# Altium PCB AD8349.PcbDoc
Units mm, origin at the board's own origin, x right, y up, seen from the top; angles counter-clockwise.
Board outline 94.9 x 39.9 mm, 2 copper layers (Top Layer, Bottom Layer); 32 components, 21 nets, 97 pads, 155 vias.
Unrouted connection lines stored in the file: 1.
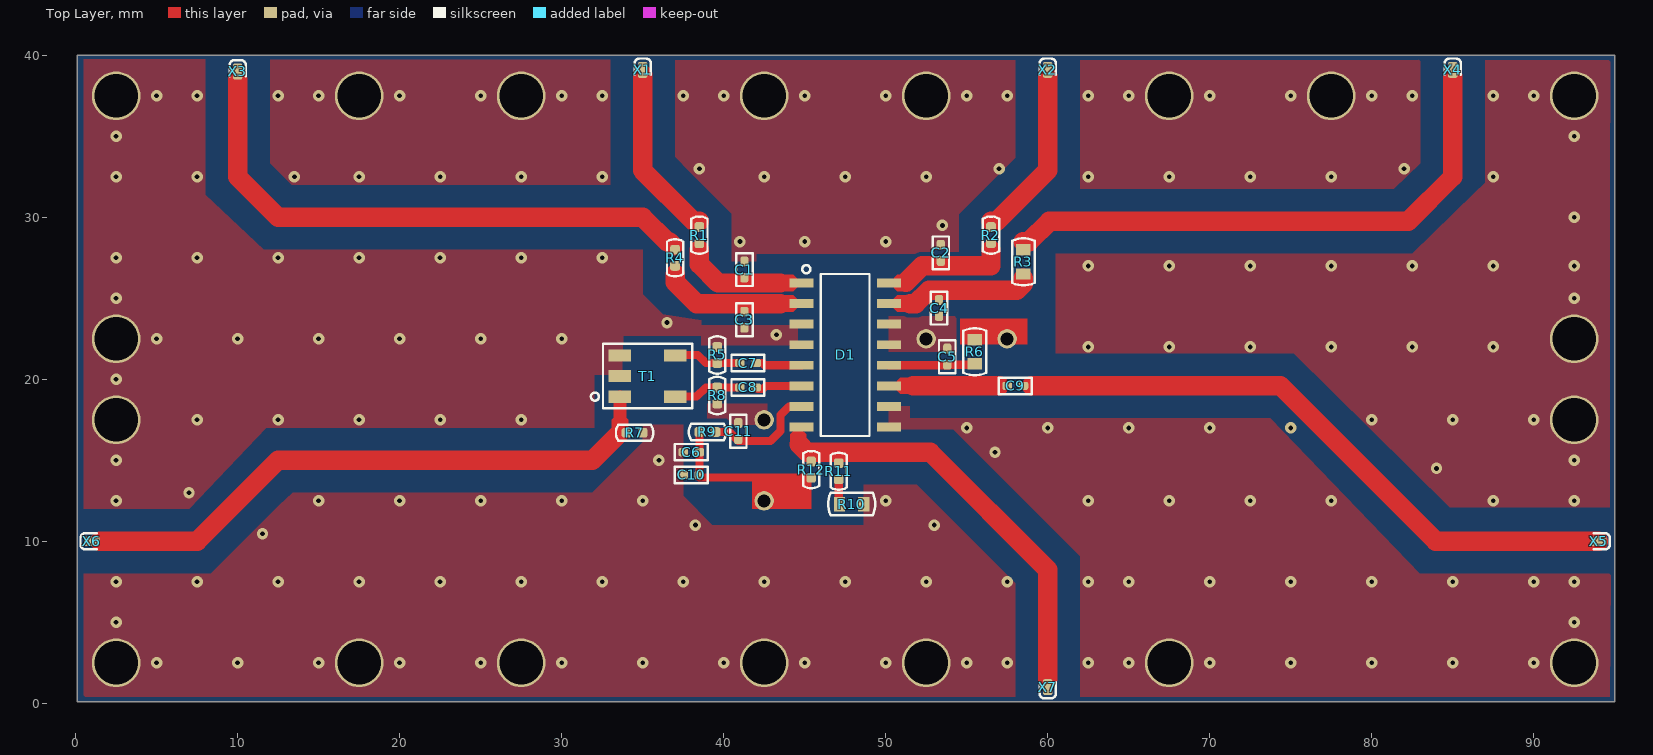
[diagram p0: Top Layer view]
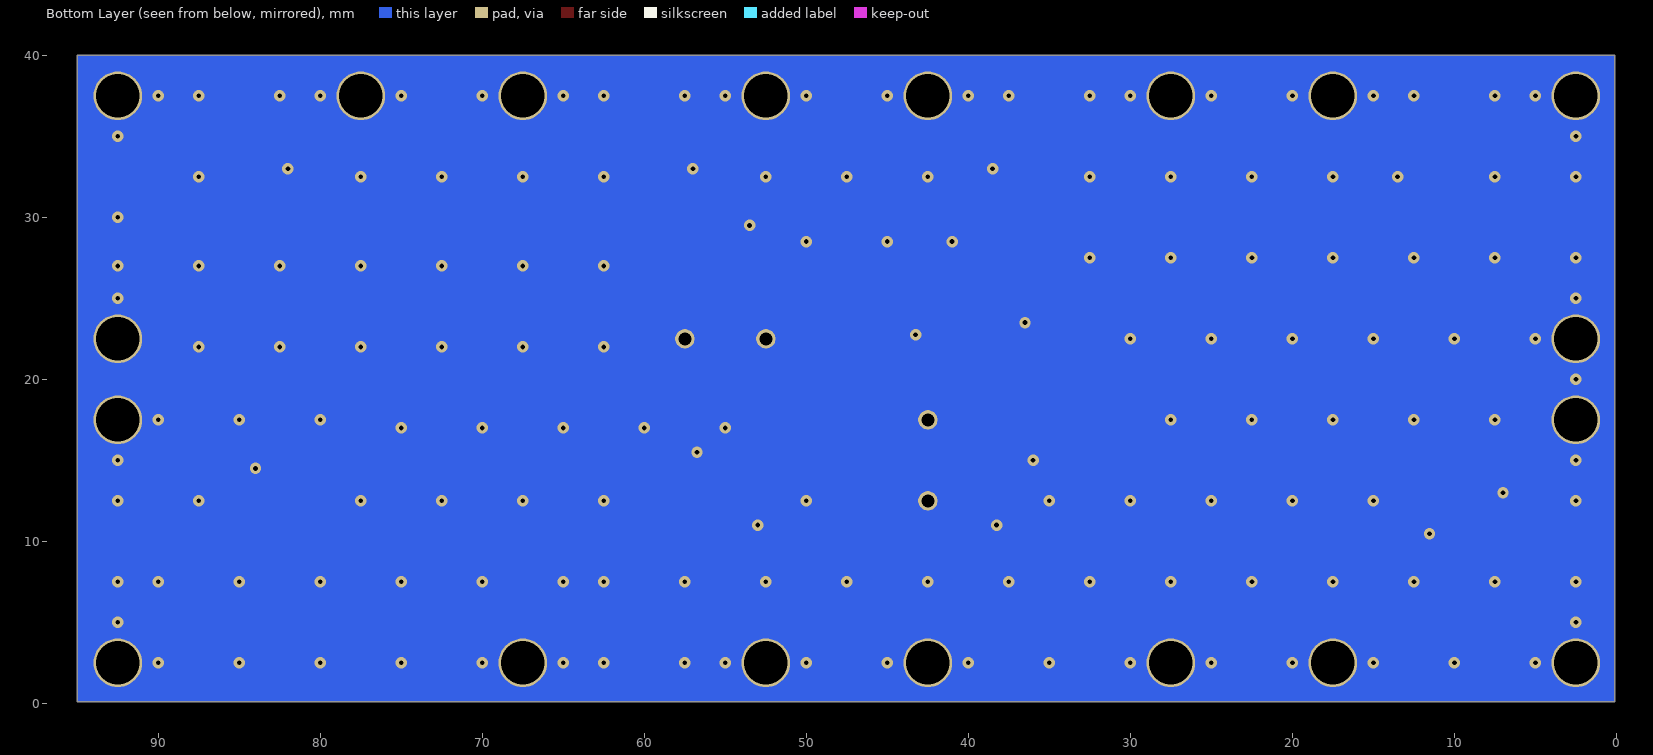
[diagram p1: Bottom Layer view, seen from below]

## Layer stack, top to bottom
Top Solder: solder mask 0.0102, Solder Resist, Dk 3.5
Top Layer: signal copper 0.0356
Dielectric 1: dielectric 0.32, FR-4, Dk 4.8
Bottom Layer: signal copper 0.0356
Bottom Solder: solder mask 0.0102, Solder Resist, Dk 3.5

## Board outline
0.1,0.1 95,0.1 95,40 0.1,40

## Design rules (kind name [scope] priority, off if disabled: settings)
Clearance [All] p1: gap=0.254 ignorepadtopadclearanceinfootprint=FALSE except(0: Arc-Hole Track-Hole SMDPad-Hole THPad-Hole Via-Hole Fill-Hole Poly-Hole Region-Hole Text-Hole)
PolygonConnect [All] p1: connectstyle=Direct reliefconductorwidth=0.254 reliefentries=4 polygonreliefangle="90 Angle" airgapwidth=0.254
RoutingVias [All] p1: holewidth=0.711 width=1.27 viastyle="Through Hole" minholewidth=0.711 minwidth=1.27 maxholewidth=0.711 maxwidth=1.27
SolderMaskExpansion [All] p1: expansion=0.102
Width [All] p1: maxlimit=0.254 minlimit=0.254 preferedwidth=0.254
30 further rules are at their usual default settings.

## Components (designator, comment, footprint, x,y, rotation, side; value= is the part's Value field where it differs from the comment)
C1 "100" CAPC1005L 41.275,26.775 r90 top
C2 "100" CAPC1005L 53.4,27.8 r90 top
C3 "100" CAPC1005L 41.275,23.675 r90 top
C4 "100" CAPC1005L 53.3,24.4 r90 top
C5 "1000" CAPC1005L 53.8,21.4 r90 top
C6 "0,1 мк" CAPC1005L 38,15.5 r180 top
C7 "1000" CAPC1005L 41.5,21 r0 top
C8 "1000" CAPC1005L 41.5,19.5 r0 top
C9 "1000" CAPC1005L 58,19.595 r0 top
C10 "0,1 мк" CAPC1005L 38,14.1 r0 top
C11 "1000" CAPC1005L 40.9,16.8 r270 top
D1 "AD8349" SOIC127P600X175-16N 47.5,21.5 r0 top
R1 "0" RESC1005L 38.5,28.9 r270 top
R2 "0" RESC1005L 56.5,28.9 r90 top
R3 "0" RESC1608L 58.5,27.25 r90 top
R4 "0" RESC1005L 37,27.5 r270 top
R5 "200" RESC1005L 39.6,21.5 r270 top
R6 "0" RESC1608L 55.5,21.7 r90 top
R7 "0" RESC1005L 34.5,16.7 r0 top
R8 "200" RESC1005L 39.6,19 r90 top
R9 "0" RESC1005L 39,16.75 r0 top
R10 "49,9" RESC1608L 47.9,12.3 r0 top
R11 "0" RESC1005L 47.1,14.325 r270 top
R12 "10 к" RESC1005L 45.4,14.425 r270 top
T1 "ETC1-1-13TR" TRANS_ETC1-1-13TR 35.3,20.2 r90 top
X1 "СРГ-50-751ФВ" TP0.6X1 35,39.1 r90 top
X2 "СРГ-50-751ФВ" TP0.6X1 60,39.1 r90 top
X3 "СРГ-50-751ФВ" TP0.6X1 10,39 r90 top
X4 "СРГ-50-751ФВ" TP0.6X1 85,39.1 r90 top
X5 "СРГ-50-751ФВ" TP0.6X1 94,10 r0 top
X6 "СРГ-50-751ФВ" TP0.6X1 1,10 r180 top
X7 "СРГ-50-751ФВ" TP0.6X1 60,1 r270 top

## Footprints (in the part's own frame and the unit in brackets; to place one, negate y for a bottom-side part, rotate by r counter-clockwise, add the part's x,y. Pads: shape width x height; smd on the part's side, far side on the other; paste and mask are expansions set on the pad)
CAPC1005L [mm] "Chip Capacitor, Body 1.0x0.5mm, IPC High Density"
  rrect50% 0.6x0.5 smd: 1(-0.5,0) 2(0.5,0)
  Top Layer pour cut-out: -0.2,0.5 -0.2,-0.5 0.2,-0.5 0.2,0.5
  silkscreen extent -1.02,-0.51 1.02,0.51, body extent -0.55,-0.3 0.55,0.3, height 0.6
RESC1005L [mm] "Chip Resistor, Body 1.1x0.5mm, IPC High Density"
  rrect50% 0.6x0.6 smd: 1(-0.5,0) 2(0.5,0)
  Top Layer pour cut-out: -0.2,0.5 -0.2,-0.5 0.2,-0.5 0.2,0.5
  silkscreen extent -1.15,-0.5 1.15,0.5, body extent -0.55,-0.3 0.55,0.3, height 0.4
RESC1608L [mm] "Chip Resistor, Body 1.6x0.8mm, IPC High Density"
  rect 0.7x0.9 smd: 1(-0.75,0) 2(0.75,0)
  Top Layer pour cut-out: -0.4,0.7 -0.4,-0.7 0.4,-0.7 0.4,0.7
  silkscreen extent -1.45,-0.7 1.45,0.7, body extent -0.85,-0.48 0.85,0.48, height 0.6
SOIC127P600X175-16N [mm] "SOIC, 16-Leads, Body 10,0x4,0mm (max), Pitch 1,27mm, IPC Medium Density"
  rect 1.5x0.55 smd: 1(-2.7,4.445) 2(-2.7,3.175) 3(-2.7,1.905) 4(-2.7,0.635) 5(-2.7,-0.635) 6(-2.7,-1.905) 7(-2.7,-3.175) 8(-2.7,-4.445) 9(2.7,-4.445) 10(2.7,-3.175) 11(2.7,-1.905) 12(2.7,-0.635) 13(2.7,0.635) 14(2.7,1.905) 15(2.7,3.175) 16(2.7,4.445)
  silkscreen extent -2.65,-5 1.5,5.54, body extent -3,-4.95 3,4.95, height 1.54
TP0.6X1 [mm] "Точка пайки переход СРГ-50-751 (плата заштифтована)"
  rrect50% 1x0.6 smd paste-25.4: 1(0,0)
  silkscreen extent -0.3,-0.5 0.7,0.5
TRANS_ETC1-1-13TR [mil] "Surface Mount transformer, 3.8x3.8x2.8"
  rect 30x55 smd: 1(-50,67.5) 2(0,67.5) 3(50,67.5) 4(50,-67.5) 5(-50,-67.5)
  silkscreen extent -79,-108 79,138, body extent -75,-95 75,95, height 112

## Part data
C1 C2 C3 C4: library part i6124B5A087471000001, "Чип-конденсатор", ManufacturerPartNumber="0402 NP0 100 пФ ±5 % 50 В", Power/Voltage="50 В", Tolerance="±5 %", ImKey=i6124B5A087471000001, Name=0402, PCADLibrary=PASSIV.LIB, PCADPattern=C0402, PCADSymbol=C, PCADType=C0402, TKE/TKC={TKE/TKC}, Type=Конденсатор
C5 C7 C8 C9 C11: library part i6124B5A08727A000007, "Чип-конденсатор", ManufacturerPartNumber="0402 C0G 1000 пФ ±5 % 50 В", Power/Voltage="50 В", Tolerance="±5 %", ImKey=i6124B5A08727A000007, Name=0402, PCADLibrary=PASSIV.LIB, PCADPattern=C0402, PCADSymbol=C, PCADType=C0402, Rem="Использовать диэлектрик NP0", TKE/TKC={TKE/TKC}, Type=Конденсатор
C6 C10: library part i6124B5A087044000001, "Чип-конденсатор", ManufacturerPartNumber="0402 X5R 0,1 мкФ ±10 % 10 В", Power/Voltage="10 В", Tolerance="±10 %", ImKey=i6124B5A087044000001, Name=0402, PCADLibrary=PASSIV.LIB, PCADPattern=C0402, PCADSymbol=C, PCADType=C0402, TKE/TKC={TKE/TKC}, Type=Конденсатор
D1: "WIDEBAND DIRECT QUADRATURE MODULATOR, 100 - 6000 MHz", Manufacturer=Hittite, Package=LP4E, ManufacturerPartNumber=AD8349, SymAuthor="Чернова Ю.Г.", Type=Микросхема
R1 R2 R4 R7 R9 R11: library part i6124B5A08703F00000B, "Чип-резистор", ManufacturerPartNumber="0402 0 Ом", Power/Voltage="0,063 Вт", Tolerance={Tolerance}, ImKey=i6124B5A08703F00000B, Name=0402, Type=Резистор
R3 R6: library part i6124B5A08711900002C, "Чип-резистор", ManufacturerPartNumber="0603 0 Ом", Power/Voltage="0,063 Вт", Tolerance={Tolerance}, ImKey=i6124B5A08711900002C, Name=0603, Type=Резистор
R5 R8: library part i6124B5A08703F00000A, "Чип-резистор", ManufacturerPartNumber="0402 200 Ом ±5 %", Power/Voltage="0,063 Вт", Tolerance="±5 %", ImKey=i6124B5A08703F00000A, Name=0402, Type=Резистор
R10: library part i6124B5A08741A00000E, "Чип-резистор", ManufacturerPartNumber="Р1-12-0,1-49,9 Ом ±1 % - Т", Power/Voltage="0,1 Вт", Tolerance="±1 %", ImKey=i6124B5A08741A00000E, Name=0603, TU/GOST="АЛЯР.434110.005 ТУ", Type=Резистор
R12: library part i6124B5A08703F000005, "Чип-резистор", ManufacturerPartNumber="0402 10 кОм ±5 %", Power/Voltage="0,063 Вт", Tolerance="±5 %", ImKey=i6124B5A08703F000005, Name=0402, Type=Резистор
T1: "Трансформатор", Manufacturer*=Mini-Circuits, Package=SM-22, Power/Voltage*=0.25Вт, ManufacturerPartNumber=ETC1-1-13TR, Type=Трансформатор
X1 X2 X3 X4 X5 X6 X7: "Переход", ManufacturerPartNumber=СРГ-50-751ФВ, TU/GOST="ВР0.364.049 ТУ", Type=Переход

## Free pads (board coordinates)
  round 3 hole 2.7: 1(2.5,2.5) 1(2.5,17.5) 1(2.5,22.5) 1(2.5,37.5) 1(17.5,2.5) 1(17.5,37.5) 1(27.5,2.5) 1(27.5,37.5) 1(42.5,2.5) 1(42.5,37.5) 1(52.5,2.5) 1(52.5,37.5) 1(67.5,2.5) 1(67.5,37.5) 1(77.5,37.5) 1(92.5,2.5) 1(92.5,17.5) 1(92.5,22.5) 1(92.5,37.5)
  round 1.2 hole 0.8: 1(42.5,12.5) 1(42.5,17.5) 1(52.5,22.5) 1(57.5,22.5)

## Via types
v1: diameter 0.7, hole 0.3, Top Layer to Bottom Layer, 155 vias

## Nets (pads, with @x,y where several pads share a name; then routed paths per layer and width w, separated by ;. In a path a pad name is that pad's centre, name@x,y a point inside that pad or via, vN(x,y) a via of type N, cw(c..) or ccw(c..) an arc to the next point about the centre after c; other vN are vias at no path point)
GND: C1.2 C2.2 C3.1 C4.1 C5.2 C6.2 C10.1 C11.1 D1.3 D1.4 D1.9 D1.10 D1.13 D1.14 pad.1@2.5,2.5 pad.1@2.5,17.5 pad.1@2.5,22.5 pad.1@2.5,37.5 pad.1@17.5,2.5 pad.1@17.5,37.5 pad.1@27.5,2.5 pad.1@27.5,37.5 pad.1@42.5,2.5 pad.1@42.5,17.5 pad.1@42.5,37.5 pad.1@52.5,2.5 pad.1@52.5,22.5 pad.1@52.5,37.5 pad.1@67.5,2.5 pad.1@67.5,37.5 pad.1@77.5,37.5 pad.1@92.5,2.5 pad.1@92.5,17.5 pad.1@92.5,22.5 pad.1@92.5,37.5 R5.1 R7.2 R8.1 R10.2 T1.2 T1.3
  other v1: 5,2.5 10,2.5 15,2.5 20,2.5 25,2.5 30,2.5 35,2.5 40,2.5 45,2.5 50,2.5 55,2.5 57.5,2.5 62.5,2.5 65,2.5 70,2.5 75,2.5 80,2.5 85,2.5 90,2.5 2.5,5 92.5,5 2.5,7.5 7.5,7.5 12.5,7.5 17.5,7.5 22.5,7.5 27.5,7.5 32.5,7.5 37.5,7.5 42.5,7.5 47.5,7.5 52.5,7.5 57.5,7.5 62.5,7.5 65,7.5 70,7.5 75,7.5 80,7.5 85,7.5 90,7.5 92.5,7.5 11.536,10.464 38.25,11 38.25,11 53,11 2.5,12.5 15,12.5 20,12.5 25,12.5 30,12.5 35,12.5 50,12.5 62.5,12.5 67.5,12.5 72.5,12.5 77.5,12.5 87.5,12.5 92.5,12.5 7,13 84,14.5 2.5,15 36,15 92.5,15 56.75,15.5 55,17 60,17 65,17 70,17 75,17 7.5,17.5 12.5,17.5 17.5,17.5 22.5,17.5 27.5,17.5 80,17.5 85,17.5 90,17.5 2.5,20 62.5,22 67.5,22 72.5,22 77.5,22 82.5,22 87.5,22 5,22.5 10,22.5 15,22.5 20,22.5 25,22.5 30,22.5 43.25,22.75 36.5,23.5 2.5,25 92.5,25 62.5,27 67.5,27 72.5,27 77.5,27 82.5,27 87.5,27 92.5,27 2.5,27.5 7.5,27.5 12.5,27.5 17.5,27.5 22.5,27.5 27.5,27.5 32.5,27.5 41,28.5 45,28.5 50,28.5 53.5,29.5 92.5,30 2.5,32.5 7.5,32.5 13.5,32.5 17.5,32.5 22.5,32.5 27.5,32.5 32.5,32.5 42.5,32.5 47.5,32.5 52.5,32.5 62.5,32.5 67.5,32.5 72.5,32.5 77.5,32.5 87.5,32.5 38.5,33 57,33 82,33 2.5,35 92.5,35 5,37.5 7.5,37.5 12.5,37.5 15,37.5 20,37.5 25,37.5 30,37.5 32.5,37.5 37.5,37.5 40,37.5 45,37.5 50,37.5 55,37.5 57.5,37.5 62.5,37.5 65,37.5 70,37.5 75,37.5 80,37.5 82.5,37.5 87.5,37.5 90,37.5
NetC1_1: C1.1 D1.1 R1.2 | length 6.4
  Top Layer w1.2: 38.5,28 38.5,27.1 39.655,25.945 43.5,25.945
NetC2_1: C2.1 D1.16 R2.1 | length 6.7
  Top Layer w1.2: 51.25,26 52.25,27 56.5,27 56.5,28
NetC3_2: C3.2 D1.2 R4.2 | length 7.5
  Top Layer w1.2: 37,26.5 37,26 38.325,24.675 43.5,24.675
NetC4_2: C4.2 D1.15 R3.1 | length 7.9
  Top Layer w1.2: 51.5,24.675 51.85,24.675 52.675,25.5 58.1,25.5 58.5,25.9 R3.1@58.5,26.25
NetC5_1: C5.1 D1.12 R6.1 | length 5.4
  Top Layer w0.5: D1.12 C5.1@53.915,20.865 ; C5.1 R6.1@55.45,20.9
NetC7_1: C7.1 R5.2 T1.4 | length 4.2
  Top Layer w0.5: T1.4@37.045,21.5 38.4,21.5 38.9,21 R5.2 C7.1
NetC7_2: C7.2 D1.5 | length 2.9
  Top Layer w0.5: C7.2 42.4,21 42.535,20.865 D1.5
NetC8_1: C8.1 R8.2 T1.5 | length 4.2
  Top Layer w0.5: T1.5 38.33,18.93 38.9,19.5 R8.2 C8.1
NetC8_2: C8.2 D1.6 | length 2.8
  Top Layer w0.5: C8.2@42.1,19.4 42.4,19.4 42.595,19.595 D1.6
NetC9_1: C9.1 D1.11 | length 5.3
  Top Layer w1.2: 51.7,19.595 57,19.595
NetC9_2: C9.2 X5.1 | length 39
  Top Layer w1.2: 59,19.6 72.5,19.6 74.366,19.6 83.966,10 X5.1
NetC11_2: C11.2 D1.7 R9.2 | length 7
  Top Layer w0.5: R9.2 40.35,16.75 40.9,16.2 42.9,16.2 43.5,16.8 43.5,17.8 44.025,18.325 D1.7
NetD1_8: D1.8 R11.1 R12.1 X7.1 | length 25.3
  Top Layer w1.2: 44.648,16.002 45.15,15.5 52.75,15.5 60,8.25 X7.1@60,1.5
NetR1_1: R1.1 X1.1 | length 10.7
  Top Layer w1.2: X1.1@35,38.8 35,32.9 38.15,29.75 38.5,29.75
NetR2_2: R2.2 X2.1 | length 10.6
  Top Layer w1.2: 56.5,29.75 56.85,29.75 60,32.9 X2.1@60,38.7
NetR3_2: R3.2 X4.1 | length 34.4
  Top Layer w1.2: 58.5,28.5 58.85,28.5 60.1,29.75 82.25,29.75 85,32.5 X4.1@85,38.7
NetR4_1: R4.1 X3.1 | length 34.6
  Top Layer w1.2: 10,38.5 10,32.5 12.5,30 35,30 36.5,28.5 36.625,28.5 R4.1@36.875,28.25
NetR7_1: R7.1 T1.1 X6.1 | length 36.2
  Top Layer w0.8: 33.6,17.6 T1.1@33.6,18.916
  Top Layer w1.2: X6.1@1.5,10 7.5,10 12.5,15 31.9,15 33.6,16.7
NetR10_1: R10.1 R11.2 | length 1.3
  Top Layer w0.5: R10.1@47.1,12.35 R11.2@47.1,13.7
VPOS: C6.1 C10.2 pad.1@42.5,12.5 pad.1@57.5,22.5 R6.2 R9.1 R12.2 | length 9.6
  Top Layer w0.5: R9.1 38.5,13.95 R12.2@45.25,13.95

## Polygon pours and split planes (outlines as drawn)
GND on Top Layer "Bottom Layer-No Net" (solid, pour order 6): 94.725,39.7 87,39.7 87,32.135 86.349,31.5 82.5,27.75 82.35,27.75 60.5,27.75 60.5,21.598 75.2,21.598 84.814,12.1 94.7,12.1 94.7,32
GND on Top Layer "Bottom Layer-No Net" (solid, pour order 4): 62,0.4 62,9.078 54.164,16.914 50.341,16.914 50.2,17.055 50.2,18.325 51.5,18.325 51.5,17.595 53.095,17.595 73.75,17.595 82.981,8 94.747,8 94.7,0.4
GND on Top Layer "Bottom Layer-No Net" (solid, pour order 2): 0.5,8 0.5,0.5 0.6,0.4 58,0.4 58,7.422 51.922,13.5 48.65,13.5 48.65,11 39.3,11 37.5,12.8 37.5,17.2 35,17.2 35,16.1 31.9,13 13.4,13 12.6,12.272 8.328,8
GND on Top Layer "Bottom Layer-No Net" (solid, pour order 16): 50.2,23.9 50.2,21.7 54.4,21.7 54.4,23.9
GND on Top Layer "Bottom Layer-No Net" (solid, pour order 14): 39,18.5 42.7,18.5 42.7,17.2 42.5,17.2 42.1,17.2 40.6,17.2 40.2,17.6 39,17.6
GND on Top Layer "Bottom Layer-No Net" (solid, pour order 12): 12,39.725 12,36.1 12,33.325 13.325,32 33,32 33,39.725
GND on Top Layer "Bottom Layer-No Net" (solid, pour order 10): 37,39.7 37,33.728 37.914,32.814 40.5,30.228 40.5,27.275 42,27.275 42,27.75 52.312,27.75 54.5,27.75 54.5,30.175 58,33.675 58,39.7
GND on Top Layer "Bottom Layer-No Net" (solid, pour order 8): 83,39.725 83,33.328 81.375,31.75 80.55,31.75 62,31.75 62,39.7
GND on Top Layer "Bottom Layer-No Net" (solid, pour order 0): 0.5,39.75 8,39.75 8,31.402 11.598,28 35,28 35,25.25 36.25,24 38.6,23.65 38.6,23.325 42.269,23.325 44.586,23.325 44.586,22.1 43.9,22.1 42.8,22.1 38.6,22.1 38.6,22.7 33.8,22.7 33.725,20.566 33.755,20.25 33.201,20.277 32,20.277 32,17 30,17 11.75,17 7,12 0.5,12 0.5,21.25 0.5,24.5 0.5,26.75 0.5,27.75 0.5,29.367 0.5,33.25 0.513,36.94 0.5,37.25

## Other copper
Top Layer:
  region net NetR7_1: 33.6,18 33.1,17.5 33.1,16.7 34.1,16.7 34.1,17.5
  region net NetD1_8: 44.6,17.1 44.1,16.6 44.1,15.8 45.1,15.8 45.1,16.6
  region net NetC9_1: 50.4,19.6 50.9,19.1 51.7,19.1 51.7,20.1 50.9,20.1
  region net NetC4_2: 50.2,24.675 50.7,24.175 51.5,24.175 51.5,25.175 50.7,25.175
  region net NetC2_1: 50.2,25.945 50.7,25.445 51.5,25.445 51.5,26.445 50.7,26.445
  region net NetC1_1: 44.8,25.945 44.3,26.445 43.5,26.445 43.5,25.445 44.3,25.445
  region net NetC3_2: 44.8,24.675 44.3,25.175 43.5,25.175 43.5,24.175 44.3,24.175
  region net VPOS: 41.75,12 45.4,12 45.4,13.95 41.75,13.95
  region net VPOS: 54.6,22.15 58.75,22.15 58.75,23.75 56.125,23.75 54.6,23.75
Bottom Layer:
  rectangle net GND: 0.1,0.1 95,39.95

## Silkscreen, mask and mechanical layers (free items; w line width, h text height)
Top Solder:
  region: 95,0.2 95,39.95 90,39.95 90,0.2
  region: 5.1,0 5.1,39.75 0.1,39.75 0.1,0
  region: 95.1,5.1 0.2,5.1 0.2,0.1 95.1,0.1
  rectangle: 0.1,35.1 95,40.1
  lines w1.5: 1.05,9.55 1.525,10.025 7.55,10.025 12.525,15 31.875,15 33.575,16.7 33.575,17.525 ; 9.9,39.2 10.075,39.025 10.075,32.525 12.6,30 35.075,30 36.475,28.6 36.525,28.6 36.875,28.25 ; 34.9,38.85 35.025,38.725 35.025,32.95 38.2,29.775 38.5,29.775 ; 36.975,25.825 36.975,26.425 ; 37.349,25.57 38.345,24.575 43.85,24.575 ; 38.5,27.825 38.5,27.1 39.725,25.875 44.025,25.875 ; 44.475,16.2 45.175,15.5 52.7,15.5 60,8.2 60,1.3 ; 51.175,24.65 51.975,24.65 52.8,25.475 57.975,25.475 58.525,26.025 ; 51.204,25.979 52.3,27.075 ; 51.25,19.55 56.975,19.575 ; 52.5,27 56.5,26.975 56.5,27.775 ; 56.575,29.65 60,33.075 60,39.075 59.85,39.225 ; 58.575,28.375 60,29.75 82.2,29.75 84.975,32.525 84.975,39.25 ; 59.1,19.575 74.25,19.5 ; 74.5,19.5 83.857,10.05 94,10
Bottom Solder:
  rectangle: 0.1,0.1 95,40
Mechanical 1:
  the board outline again, w0.5